# EAGLE board bq25570_board_large (EAGLE 7.2.0)
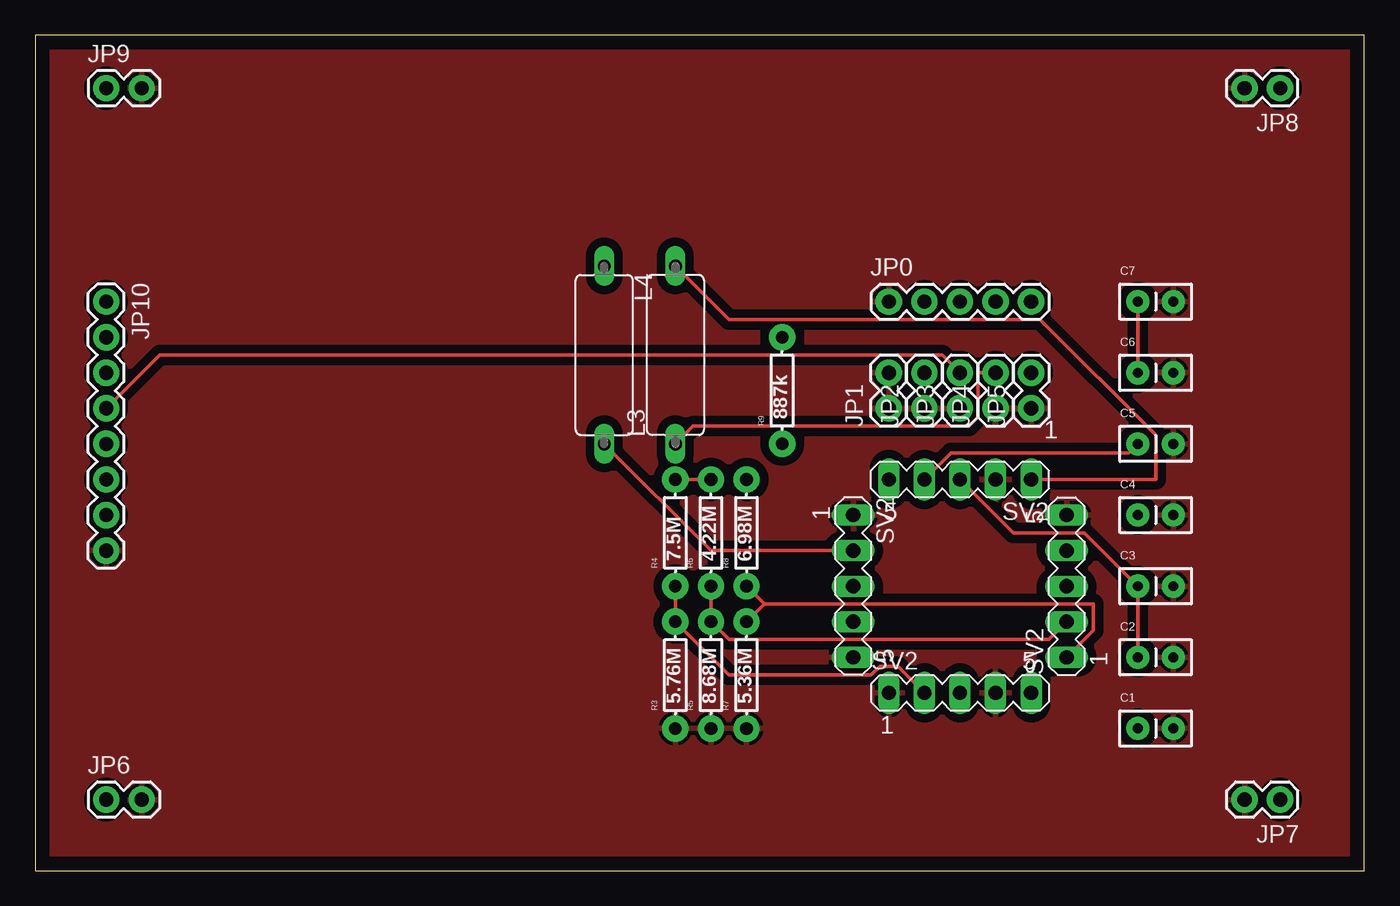
[diagram p0: board, top side]
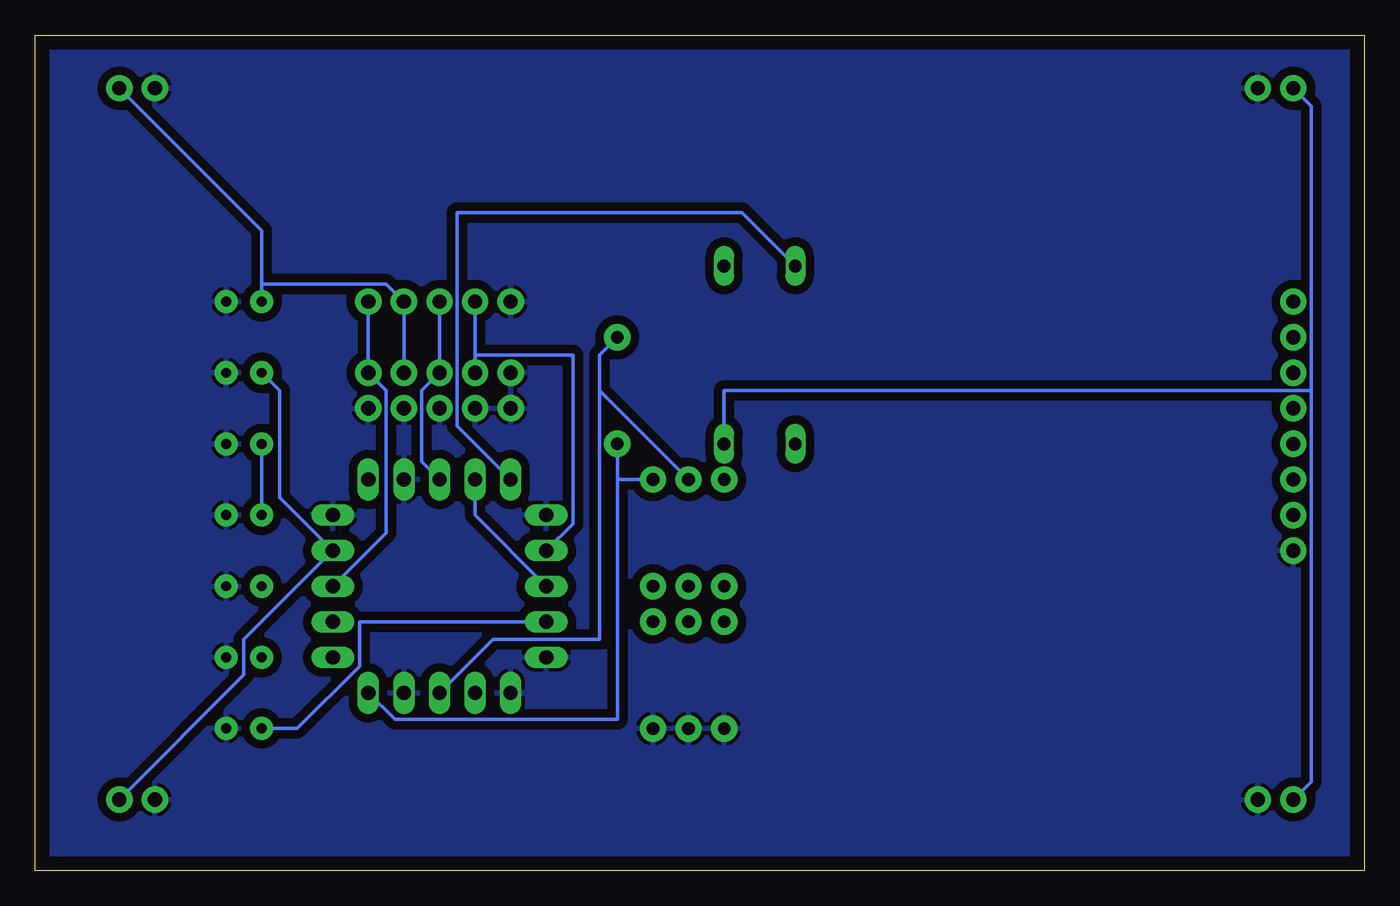
[diagram p1: board, bottom side, seen from below]

Size 94.92 x 59.68 mm. Coordinates in mm from the lower left corner, seen from the top.
Outline: 0,0 94.92,0 94.92,59.68 0,59.68 0,0
Copper layers (1*16): Top 0.035mm / dielectric 1.5mm / Bottom 0.035mm
Design rules "default": minimum track width 10mil, minimum drill 24mil, track to track 8mil, track to pad 8mil, pad to pad 8mil, via to via 8mil, smd to smd 8mil, copper to edge 40mil, drill to drill 8mil, minimum pad ring 10mil, minimum via ring 8mil, stop-mask expansion 4mil, vias tented up to drill 0mil, thermal gap 10mil

## Footprints (pad centres in the part's own frame; a part is rotated, then mirrored left to right if it is on the bottom)
CAP-PTH-SMALLEZ = drill 0.7 pad 1.651: 1 0,0; 2 2.54,0
1X05 = drill 1.016 pad 1.88: 1 0,0; 2 2.54,0; 3 5.08,0; 4 7.62,0; 5 10.16,0
1X02 = drill 1.016 pad 1.88: 1 0,0; 2 2.54,0
1X08_ROUND = drill 1.016 pad 1.88: 1 0,0; 2 2.54,0; 3 5.08,0; 4 7.62,0; 5 10.16,0; 6 12.7,0; 7 15.24,0; 8 17.78,0
BC12 = drill 0.914 long: 1 -6.35,0; 2 6.35,0
AXIAL-0.3 = drill 0.9 pad 1.88: P$1 -3.81,0; P$2 3.81,0
MA05-1 = drill 1.016 long: 1 -7.62,5.08; 2 -7.62,2.54; 3 -7.62,0; 4 -7.62,-2.54; 5 -7.62,-5.08; 6 -5.08,-7.62; 7 -2.54,-7.62; 8 0,-7.62; 9 2.54,-7.62; 10 5.08,-7.62; 11 7.62,-5.08; 12 7.62,-2.54; 13 7.62,0; 14 7.62,2.54; 15 7.62,5.08; 16 5.08,7.62; 17 2.54,7.62; 18 0,7.62; 19 -2.54,7.62; 20 -5.08,7.62

## Placement (x,y rotation side)
C1  0.01uF  [CAP-PTH-SMALLEZ]  78.74,10.16 0 top
C2  100uF  [CAP-PTH-SMALLEZ]  78.74,15.24 0 top
C3  100uF  [CAP-PTH-SMALLEZ]  78.74,20.32 0 top
C4  4.7uF  [CAP-PTH-SMALLEZ]  78.74,25.4 0 top
C5  0.1uF  [CAP-PTH-SMALLEZ]  78.74,30.48 0 top
C6  22uF  [CAP-PTH-SMALLEZ]  78.74,35.56 0 top
C7  1000uF  [CAP-PTH-SMALLEZ]  78.74,40.64 0 top
JP0  [1X05]  60.96,40.64 0 top
JP1  [1X02]  60.96,33.02 90 top
JP2  [1X02]  63.5,33.02 90 top
JP3  [1X02]  66.04,33.02 90 top
JP4  [1X02]  68.58,33.02 90 top
JP5  [1X02]  71.12,33.02 90 top
JP6  [1X02]  5.08,5.08 0 top
JP7  [1X02]  88.9,5.08 180 top
JP8  [1X02]  88.9,55.88 180 top
JP9  [1X02]  5.08,55.88 0 top
JP10  [1X08_ROUND]  5.08,40.64 270 top
L3  10uH  [BC12]  45.72,36.83 90 top
L4  22uH  [BC12]  40.64,36.83 270 top
R3  5.76M  [AXIAL-0.3]  45.72,13.97 90 top
R4  7.5M  [AXIAL-0.3]  45.72,24.13 90 top
R5  8.68M  [AXIAL-0.3]  48.26,13.97 90 top
R6  4.22M  [AXIAL-0.3]  48.26,24.13 90 top
R7  5.36M  [AXIAL-0.3]  50.8,13.97 90 top
R8  6.98M  [AXIAL-0.3]  50.8,24.13 90 top
R9  887k  [AXIAL-0.3]  53.34,34.29 90 top
SV2  [MA05-1]  66.04,20.32 0 top

## Library data of the parts
C1-C7 = SparkFun-Capacitors
JP0 JP1-JP10 = SparkFun-Connectors
L3 L4 = inductors
R3-R9 = SparkFun-Resistors; PROD_ID: RES-12182
SV2 = bq25570_board; OC_FARNELL: unknown; OC_NEWARK: unknown

## Nets
LBOOST: L4.1 SV2.20
LBUCK: L3.2 SV2.16
N$2: JP10.7
N$3: JP10.6
N$4: JP10.5
N$6: JP10.3
N$7: JP10.2
N$8: JP10.1
OK_HYST: R8.P$2 R9.P$1 SV2.10
OK_PROG: R7.P$2 R8.P$1 SV2.11
VBAT: C2.1 C3.1 JP0.3 JP3.2 JP10.4 SV2.18
VBAT_OK: JP0.5 JP5.2 SV2.13
VBAT_OV: R3.P$2 R4.P$1 SV2.7
VIN: JP0.2 JP2.2 L4.2 SV2.2
VOUT: C6.1 C7.1 JP0.4 JP4.2 JP6.1 JP7.1 JP8.1 JP9.1 L3.1 SV2.14
VOUT_SET: R5.P$2 R6.P$1 SV2.12
VRDIV: R4.P$2 R6.P$2 R9.P$2 SV2.8
VREF_SAMP: C1.1 SV2.4
VSS: C1.2 C2.2 C3.2 C4.2 C5.2 C6.2 C7.2 JP0.1 JP1.1 JP1.2 JP2.1 JP3.1 JP4.1 JP5.1 JP6.2 JP7.2 JP8.2 JP9.2 JP10.8 R3.P$1 R5.P$1 R7.P$1 SV2.1 SV2.5 SV2.6 SV2.9 SV2.15 SV2.17
VSTOR: C4.1 C5.1 SV2.3 SV2.19

## Tracks (layer width: path | path; a pad name or v marks a point on that pad's centre or on a via)
LBOOST
  Bottom 0.254: L4.1 44.45,46.99 64.77,46.99 64.77,31.75 SV2.20
LBUCK
  Top 0.254: L3.2 49.53,39.37 71.75,39.37 80.01,31.11 80.01,27.94 SV2.16
OK_HYST
  Bottom 0.254: SV2.10 69.22,10.79 53.34,10.79 53.34,27.94 | R9.P$1 53.34,27.94 | 53.34,27.94 R8.P$2
OK_PROG
  Top 0.254: SV2.11 75.56,17.14 75.56,19.05 52.07,19.05 | R8.P$1 52.07,19.05 | 52.07,19.05 R7.P$2
VBAT
  Top 0.254: C2.1 C3.1 74.93,24.13 69.85,24.13 SV2.18 | JP10.4 8.89,36.83 64.77,36.83 JP3.2
  Bottom 0.254: SV2.18 67.31,29.21 67.31,34.29 JP3.2 JP0.3
VBAT_OK
  Bottom 0.254: SV2.13 69.85,24.13 69.85,34.29 JP5.2 JP0.5
VBAT_OV
  Top 0.254: SV2.7 61.59,14.61 60.33,14.61 59.69,13.97 49.53,13.97 R3.P$2 R4.P$1
VIN
  Top 0.254: L4.2 48.26,22.86 SV2.2
  Bottom 0.254: JP0.2 63.5,36.83 | 63.5,36.83 JP2.2 | 63.5,36.83 56.52,36.83 56.52,24.77 SV2.2
VOUT
  Top 0.254: L3.1 46.99,31.75 66.67,31.75 67.31,32.38 67.31,35.56 JP4.2 | C6.1 C7.1
  Bottom 0.254: JP6.1 3.81,6.35 3.81,34.29 | 3.81,34.29 3.81,54.61 JP9.1 | JP4.2 JP0.4 69.85,41.91 78.74,41.91 | C6.1 77.47,34.29 77.47,26.67 SV2.14 80.01,16.51 80.01,13.97 JP7.1 | JP8.1 78.74,45.72 78.74,41.91 | C7.1 78.74,41.91 | 3.81,34.29 45.72,34.29 L3.1
VOUT_SET
  Top 0.254: SV2.12 72.39,16.51 49.53,16.51 R5.P$2 R6.P$1
VRDIV
  Top 0.254: R6.P$2 R4.P$2
  Bottom 0.254: SV2.8 62.23,16.51 54.61,16.51 54.61,34.29 | 54.61,34.29 54.61,36.83 R9.P$2 | 54.61,34.29 R6.P$2
VREF_SAMP
  Bottom 0.254: SV2.4 71.75,17.78 71.75,14.61 76.2,10.16 C1.1
VSS
  pour Bottom (isolate 0.61): 0,0 96.52,0 96.52,60.96 0,60.96
  pour Top (isolate 0.61): 0,0 96.52,0 96.52,60.96 0,60.96
VSTOR
  Top 0.254: C5.1 78.11,29.84 65.41,29.84 SV2.19
  Bottom 0.254: C5.1 C4.1 | SV2.3 63.5,25.4 SV2.19